# Altium PCB PCB1.PcbDoc
Units mil, origin at the board's own origin, x right, y up, seen from the top; angles counter-clockwise.
Board outline 6000 x 4000 mil, 2 copper layers (Top Layer, Bottom Layer), stack 34.296 mil thick; 49 components, 48 nets, 187 pads, 0 vias.
Unrouted connection lines stored in the file: 131.
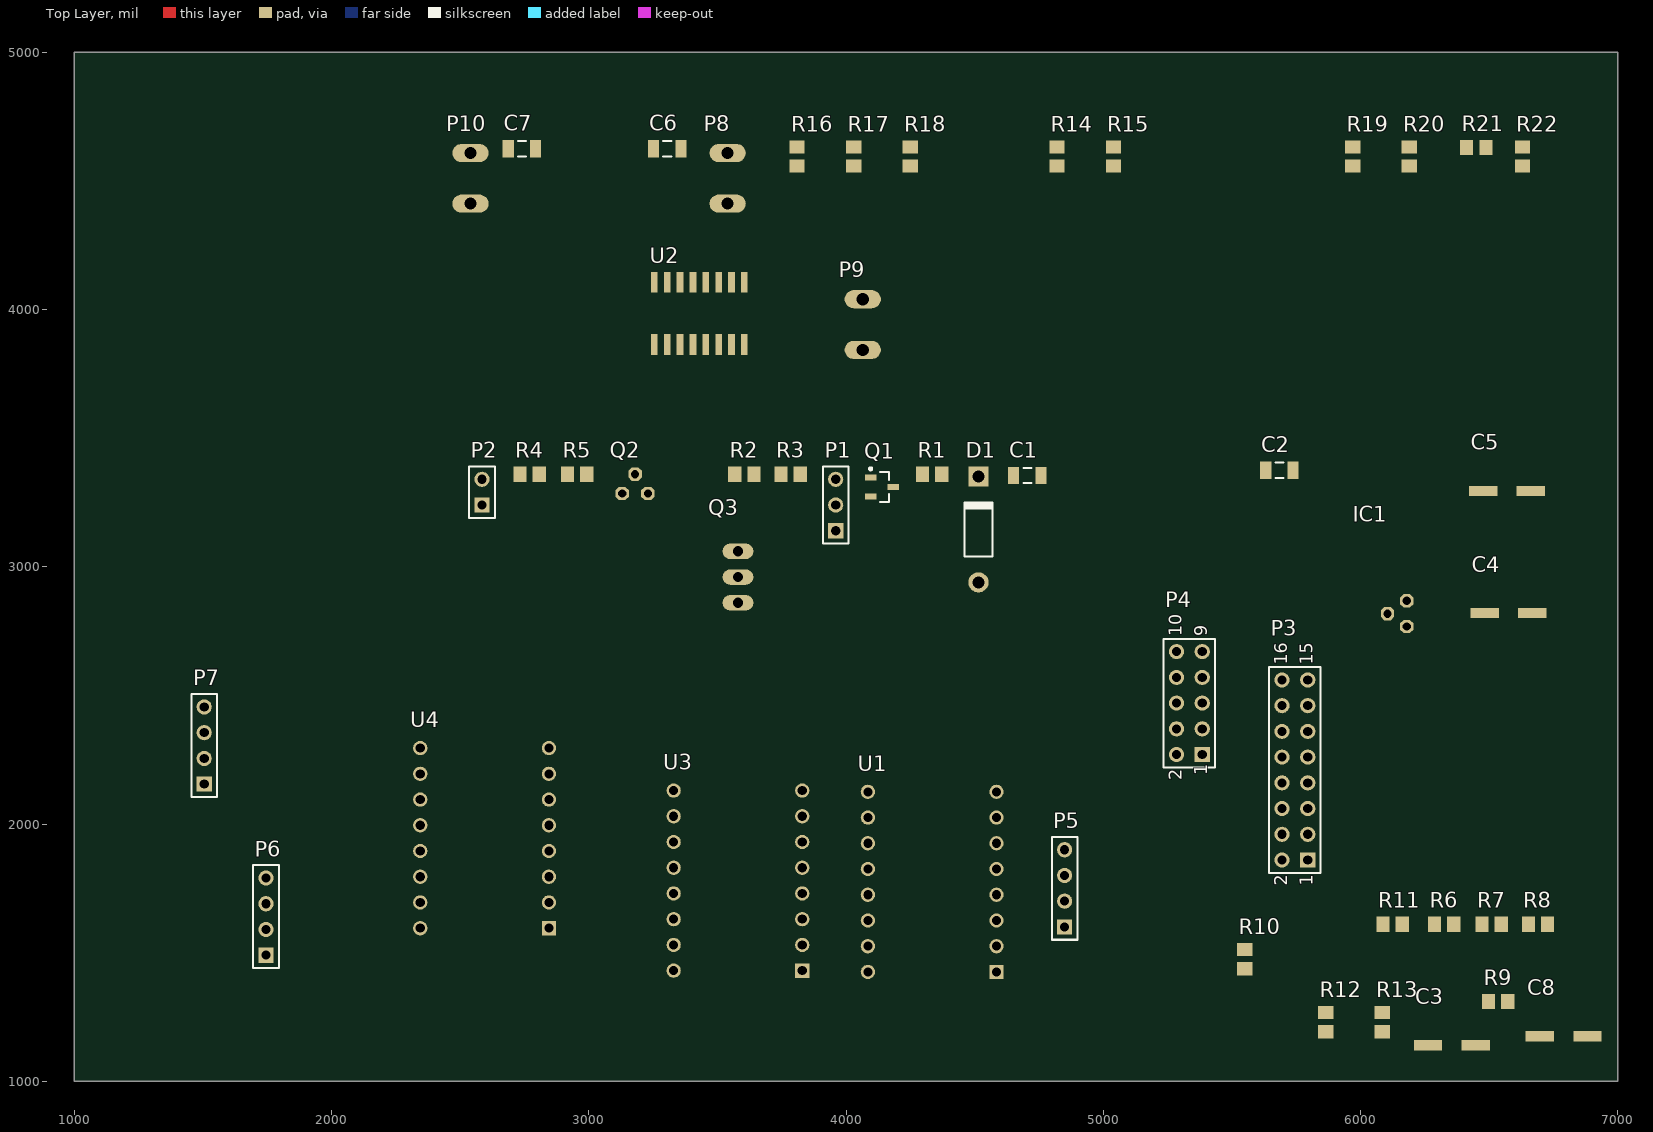
[diagram p0: Top Layer view]
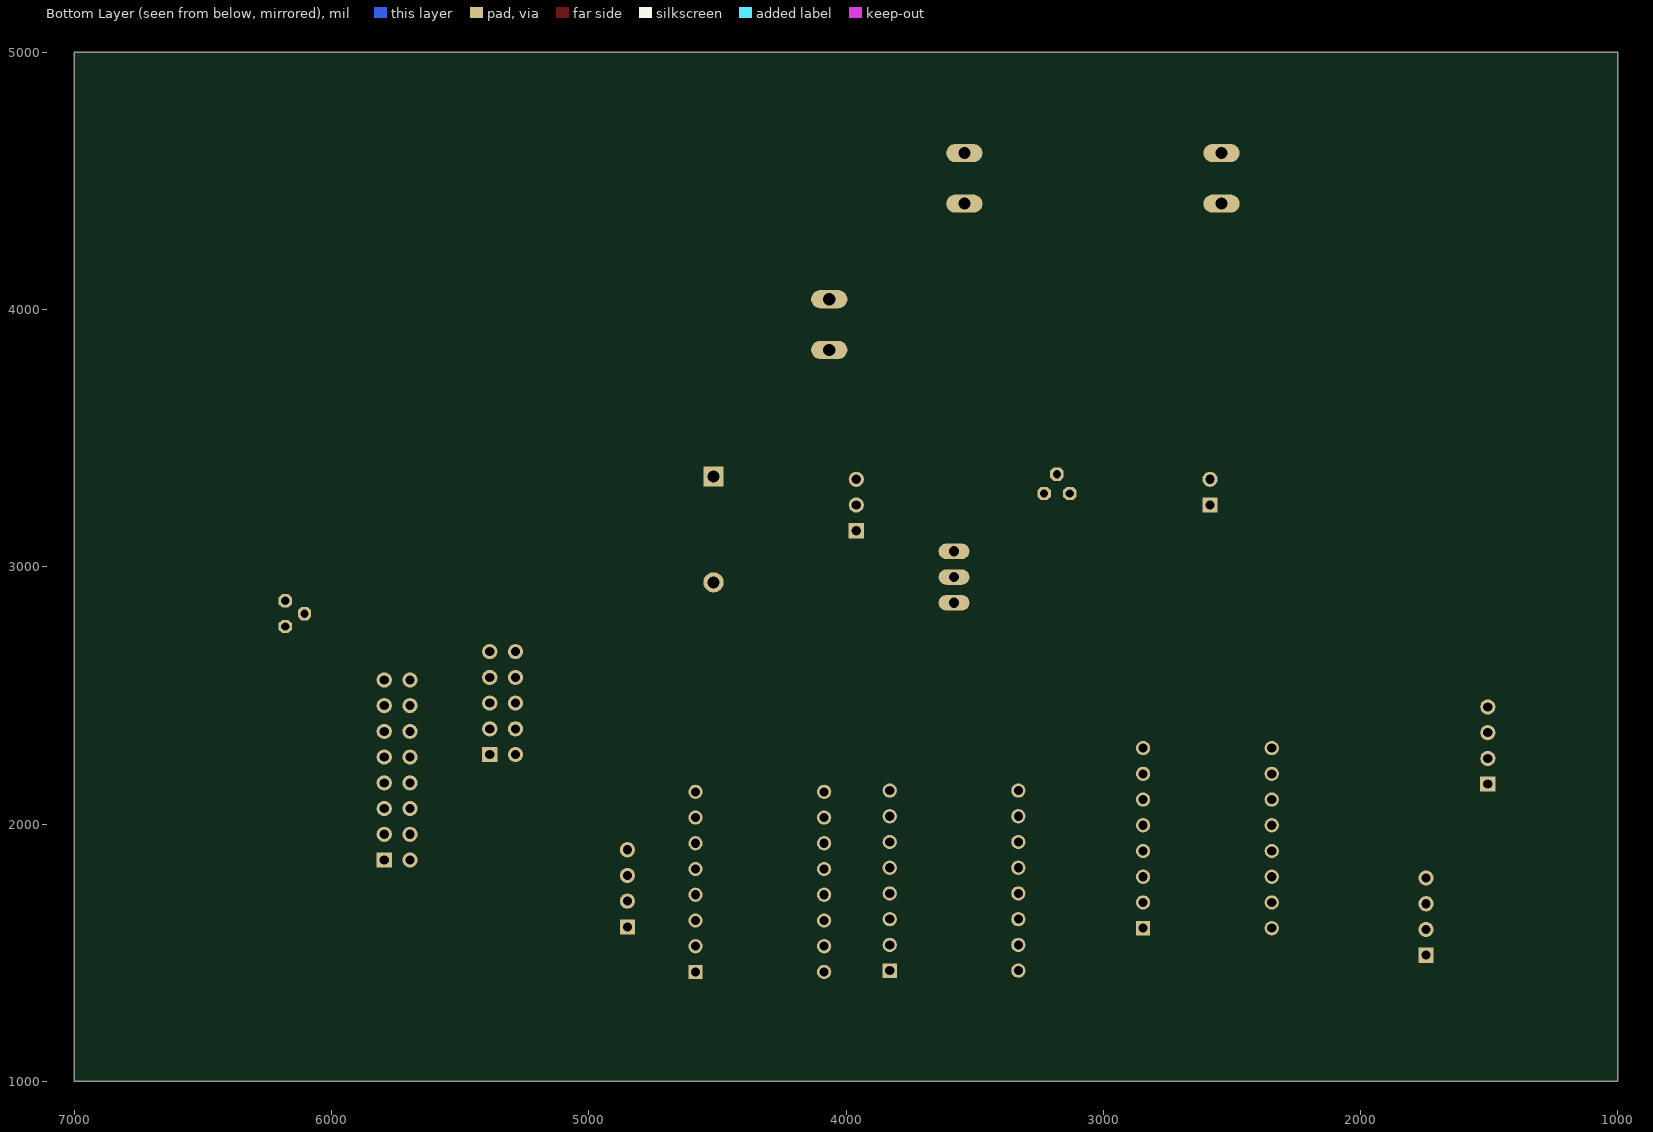
[diagram p1: Bottom Layer view, seen from below]

## Layer stack, top to bottom
Top Solder: solder mask 0.4, Solder Resist, Dk 3.5
Top Layer: signal copper 1.4
Dielectric 1: dielectric 31.4961, FR-4, Dk 4.8
Bottom Layer: signal copper 1.4
Bottom Solder: solder mask 0.4, Solder Resist, Dk 3.5

## Board outline
1000,1000 7000,1000 7000,5000 1000,5000

## Design rules (kind name [scope] priority, off if disabled: settings)
Clearance [All] p1: gap=10 ignorepadtopadclearanceinfootprint=FALSE except(0: Arc-Hole Track-Hole SMDPad-Hole THPad-Hole Via-Hole Fill-Hole Poly-Hole Region-Hole Text-Hole)
Height [All] p1: minheight=0 maxheight=10000 prefheight=500
PolygonConnect [All] p1: connectstyle=Relief reliefconductorwidth=10 reliefentries=4 polygonreliefangle="90 Angle" airgapwidth=10
RoutingVias [All] p1: holewidth=28 width=50 viastyle="Through Hole" minholewidth=28 minwidth=50 maxholewidth=28 maxwidth=50
SolderMaskExpansion [All] p1: expansion=4
Width [All] p1: maxlimit=10 minlimit=10 preferedwidth=10
29 further rules are at their usual default settings.

## Components (designator, comment, footprint, x,y, rotation, side; value= is the part's Value field where it differs from the comment)
C1 "Cap Semi" C1206 4705,3355 r0 top value=10uF
C2 "Cap Semi" C1206 5685,3375 r0 top value=10uF
C3 "Cap Pol1" UD-6,3X5,8_NICHICON 6355,1140 r0 top value=100pF
C4 "Cap Pol1" UD-6,3X5,8_NICHICON 6575,2820 r0 top value=100pF
C5 "Cap Pol1" UD-6,3X5,8_NICHICON 6570,3295 r0 top value=100pF
C6 "Cap Semi" C1206 3305,4625 r0 top value=10uF
C7 "Cap Semi" C1206 2740,4625 r0 top value=10uF
C8 "Cap Pol1" UD-6,3X5,8_NICHICON 6790,1175 r0 top value=100pF
D1 "Diode 1N4004" DO-41 4515,3145 r90 top
IC1 "78L05" TO92 6180,2817.72 r90 top
P1 "Header 3" HDR1X3 3960,3140 r90 top
P2 "Header 2" HDR1X2 2585,3240 r90 top
P3 "Header 8X2" HDR2X8 5795,1860 r90 top
P4 "Header 5X2" HDR2X5 5385,2270 r90 top
P5 "Header 4" HDR1X4 4850,1600 r90 top
P6 "Header 4" HDR1X4 1745,1490 r90 top
P7 "Header 4" HDR1X4 1505,2155 r90 top
P8 "Header 2" W237-102 3490,4510 r90 top
P9 "Header 2" W237-102 4015,3941.57 r90 top
P10 "Header 2" W237-102 2490,4510 r90 top
Q1 "PNP" SOT-23B_N 4140,3310 r0 top
Q2 "NPN" TO92 3180,3285 r0 top
Q3 "NMOS-2" TO220BV 3480,2960 r90 top
R1 "ERA6Y" ERA-0805 4335,3360 r0 top value=10k
R2 "ERA6Y" ERA-0805 3605,3360 r0 top value=10k
R3 "ERA6Y" ERA-0805 3785,3360 r0 top value=10k
R4 "ERA6Y" ERA-0805 2770,3360 r0 top value=10k
R5 "ERA6Y" ERA-0805 2955,3360 r0 top value=10k
R6 "ERA6Y" ERA-0805 6325,1610 r0 top value=10k
R7 "ERA6Y" ERA-0805 6510,1610 r0 top value=10k
R8 "ERA6Y" ERA-0805 6690,1610 r0 top value=10k
R9 "ERA6Y" ERA-0805 6535,1310 r0 top value=10k
R10 "ERA6Y" ERA-0805 5550,1475 r90 top value=10k
R11 "ERA6Y" ERA-0805 6125,1610 r0 top value=10k
R12 "ERA6Y" ERA-0805 5865,1230 r90 top value=10k
R13 "ERA6Y" ERA-0805 6085,1230 r90 top value=10k
R14 "ERA6Y" ERA-0805 4820,4595 r90 top value=10k
R15 "ERA6Y" ERA-0805 5040,4595 r90 top value=10k
R16 "ERA6Y" ERA-0805 3810,4595 r90 top value=10k
R17 "ERA6Y" ERA-0805 4030,4595 r90 top value=10k
R18 "ERA6Y" ERA-0805 4250,4595 r90 top value=10k
R19 "ERA6Y" ERA-0805 5970,4595 r90 top value=10k
R20 "ERA6Y" ERA-0805 6190,4595 r90 top value=10k
R21 "ERA6Y" ERA-0805 6450,4630 r0 top value=10k
R22 "ERA6Y" ERA-0805 6630,4595 r90 top value=10k
U1 "LV7829" LV8729_BREAKOUT 4135,1475 r90 top value=SNx4HC595
U2 "SNx4HC595" SO16 3430,3985 r0 top
U3 "LV7829" LV8729_BREAKOUT 3380,1480 r90 top value=SNx4HC595
U4 "LV7829" LV8729_BREAKOUT 2395,1645 r90 top value=SNx4HC595

## Footprints (in the part's own frame and the unit in brackets; to place one, negate y for a bottom-side part, rotate by r counter-clockwise, add the part's x,y. Pads: shape width x height; smd on the part's side, far side on the other; paste and mask are expansions set on the pad)
C1206 [mm] "Chip Capacitor, Body 3.2x1.6mm, IPC High Density"
  rect 1.1x1.7 smd: 1(-1.35,0) 2(1.35,0)
  silkscreen extent -0.4,-0.75 0.4,0.75, body extent -1.6,-0.8 1.6,0.82, height 1.64
DO-41 [mm] "Diode, Axial; Body 5.2 x 2.7 mm (LxDia. max), Lead Dia. 0.86 mm (max)"
  round 2 hole 1.2: 1(-5.23,0)
  rect 2x2 hole 1.2: 2(5.23,0)
  silkscreen extent -2.65,-1.4 2.75,1.4, body extent -6.01,-1.27 5.01,1.37, height 1.32
ERA-0805 [mm] "Chip Resistor; Body 2 x 1.3 mm (LxW typ)"
  rect 1.3x1.5 smd: 1(-0.95,0) 2(0.95,0)
  body extent -1.24,-0.65 1.29,0.6, height 0.51
HDR1X2 [mm] "Connector; Header; 2 Position"
  rect 1.5x1.5 hole 0.9: 1(0,0)
  round 1.5 hole 0.9: 2(2.54,0)
  silkscreen extent -1.27,-1.27 3.81,1.27, body extent -1.26,-1.28 3.82,1.26, height 8.61
HDR1X3 [mm] "Connector; Header; 3 Position"
  rect 1.5x1.5 hole 0.9: 1(0,0)
  round 1.5 hole 0.9: 2(2.54,0) 3(5.08,0)
  silkscreen extent -1.27,-1.27 6.35,1.27, body extent -1.29,-1.28 6.33,1.26, height 8.61
HDR1X4 [mm] "Connector; Header; 4 Position"
  rect 1.5x1.5 hole 0.9: 1(0,0)
  round 1.5 hole 0.9: 2(2.54,0) 3(5.08,0) 4(7.62,0)
  silkscreen extent -1.27,-1.27 8.89,1.27, body extent -1.28,-1.28 8.88,1.26, height 8.61
HDR2X5 [mm] "Connector; Header; 5x2 Position"
  rect 1.5x1.5 hole 0.9: 1(0,0)
  round 1.5 hole 0.9: 2(0,2.54) 3(2.54,0) 4(2.54,2.54) 5(5.08,0) 6(5.08,2.54) 7(7.62,0) 8(7.62,2.54) 9(10.16,0) 10(10.16,2.54)
  silkscreen extent -1.27,-1.27 11.43,3.81, body extent -1.28,-1.28 11.42,3.8, height 8.61
HDR2X8 [mm] "Connector; Header; 8x2 Position"
  rect 1.5x1.5 hole 0.9: 1(0,0)
  round 1.5 hole 0.9: 2(0,2.54) 3(2.54,0) 4(2.54,2.54) 5(5.08,0) 6(5.08,2.54) 7(7.62,0) 8(7.62,2.54) 9(10.16,0) 10(10.16,2.54) 11(12.7,0) 12(12.7,2.54) 13(15.24,0) 14(15.24,2.54) 15(17.78,0) 16(17.78,2.54)
  silkscreen extent -1.27,-1.27 19.05,3.81, body extent -1.29,-1.28 19.03,3.8, height 8.61
LV8729_BREAKOUT [mil] "LV8729_BREAKOUT"
  rect 55.43x55.43 hole 35.43: 1(-50,-450)
  round 55.43 / inner round 0 / far side round 55.43 hole 35.43: 2(50,-450) 3(150,-450) 4(250,-450) 5(350,-450) 6(450,-450) 7(550,-450) 8(650,-450) 9(650,50) 10(550,50) 11(450,50) 12(350,50) 13(250,50) 14(150,50) 15(50,50) 16(-50,50)
  body extent -100,-501 701,99, height 1024
SO16 [mil] "SO16"
  rect 26x80 smd: 1(-175,-121) 2(-125,-121) 3(-75,-121) 4(-25,-121) 5(25,-121) 6(75,-121) 7(125,-121) 8(175,-121) 9(175,121) 10(125,121) 11(75,121) 12(25,121) 13(-25,121) 14(-75,121) 15(-125,121) 16(-175,121)
  body extent -198,-121 198,121, height 79
SOT-23B_N [mm] "SOT23, 3-Leads, Body 2.9x1.3mm, Pitch 0.95mm, Lead Span 2.4mm, IPC Medium Density"
  rect 1.15x0.6 smd: 1(-1.125,0.95) 2(-1.125,-0.95) 3(1.125,0)
  silkscreen extent -1.25,-1.5 0.7,1.92, body extent -1.14,-1.45 1.19,1.45, height 1
TO92 [mil] "TO92"
  oct 52x52 / inner round 0 / far side oct 52x52 hole 32: 1(-50,0) 2(0,75) 3(50,0)
  body extent -98,-55 99,116, height 323
TO220BV [mil] "TO220BV"
  oval 60x120 / inner round 0 / far side oval 60x120 hole 40: 1(-100,-100) 2(0,-100) 3(100,-100)
  body extent -200,-155 200,25, height 730
UD-6,3X5,8_NICHICON [mm] "UD-6,3X5,8_NICHICON"
  rect 2.8x1 smd: 1(2.35,0) 2(-2.35,0)
  body extent -3.67,-3.3 3.63,3.3, height 5.41
W237-102 [mil] "W237-102"
  oval 70.5x141 / inner round 0 / far side oval 70.5x141 hole 47: 1(-98.43,-50) 2(98.43,-50)
  body extent -209,-187 201,120, height 409

## Part data
C1 C2 C6 C7: "Capacitor (Semiconductor SIM Model)", LatestRevisionDate=29-May-2009, LatestRevisionNote="IPC-7351 Footprint Added.", PackageDescription="Chip Capacitor", PackageReference=C1206, Published=8-Jun-2000, Publisher="Altium Limited"
C3 C4 C5 C8: "Polarized Capacitor (Radial)", LatestRevisionDate=17-Jul-2002, LatestRevisionNote="Re-released for DXP Platform.", PackageDescription="Polarized Capacitor (Radial); 2 Leads", PackageReference=RB7.6-15, Published=8-Jun-2000, Publisher="Altium Limited"
D1: "1 Amp General Purpose Rectifier", Code_JEDEC=DO-204-AL, ComponentLink1Description="Manufacturer Link", ComponentLink1URL=http://www.fairchildsemi.com/, ComponentLink2Description=Datasheet, ComponentLink2URL=http://www.fairchildsemi.com/ds/1N%2F1N4001.pdf, DatasheetVersion=1998, LatestRevisionDate=17-Jul-2002, LatestRevisionNote="Re-released for DXP Platform.", PackageDescription="Diode, Axial; Body 5.2 x 2.7 mm (LxDia. max), Lead Dia. 0.86 mm (max)", PackageReference=DO-41, PackageVersion=Aug-1999, Published=8-Jun-2000, Publisher="Altium Limited"
IC1: library part "Volt Reg", "Voltage Regulator", LatestRevisionDate=29-May-2009, LatestRevisionNote="IPC-7351 Footprint Added.", PackageDescription="3-Pin Transistor Outline Package 2.54 mm Pitch, 15.1 mm Lead Span", PackageReference=D2PAK, Published=24-Mar-1999, Publisher="Altium Limited"
P1: "Header, 3-Pin", LatestRevisionDate=17-Jul-2002, LatestRevisionNote="Re-released for DXP Platform.", Publisher="Altium Limited"
P2 P8 P9 P10: "Header, 2-Pin", LatestRevisionDate=17-Jul-2002, LatestRevisionNote="Re-released for DXP Platform.", Publisher="Altium Limited"
P3: "Header, 8-Pin, Dual row", LatestRevisionDate=17-Jul-2002, LatestRevisionNote="Re-released for DXP Platform.", Publisher="Altium Limited"
P4: "Header, 5-Pin, Dual row", LatestRevisionDate=17-Jul-2002, LatestRevisionNote="Re-released for DXP Platform.", Publisher="Altium Limited"
P5 P6 P7: "Header, 4-Pin", LatestRevisionDate=17-Jul-2002, LatestRevisionNote="Re-released for DXP Platform.", Publisher="Altium Limited"
Q1: "PNP Bipolar Transistor", LatestRevisionDate=29-May-2009, LatestRevisionNote="IPC-7351 Footprint Added.", PackageDescription="3-Pin SOT-23 Package 0.95 mm Pitch, 2.4 mm Lead Span", PackageReference=SOT-23B, PackageVersion=Aug-1999, Published=8-Jun-2000, Publisher="Altium Limited"
Q2: "NPN Bipolar Transistor", Code_JEDEC=TO-226-AA, LatestRevisionDate=17-Jul-2002, LatestRevisionNote="Re-released for DXP Platform.", PackageDescription="TO, Flat Index; 3 In-Line, Axial Leads; Body Dia. 4.8mm; Leads 0.55 x 0.51 mm (max)", PackageReference=TO-226-AA, Published=8-Jun-2000, Publisher="Altium Limited"
Q3: "N-Channel Power MOSFET", ComponentLink1Description="Manufacturer Link", ComponentLink1URL=http://www.irf.com/, DatasheetVersion=PD-9.814, LatestRevisionDate=17-Jul-2002, LatestRevisionNote="Re-released for DXP Platform.", Note="Pin 2 is electrically connected to pin 4.", PackageDescription="TO, Thru-Hole, Vertical, Heatsink Mounted; 3 In-Line Leads; Pitch 2.54 mm", PackageReference=TO-220AB, PackageVersion=Feb-1997, Published=8-Jun-2000, Publisher="Altium Limited"
R1 R2 R3 R4 R5 R6 R7 R8 R9 R10 R11 R12 R13 R14 R15 R16 R17 R18 R19 R20 R21 R22: "Rectangular Thick Film Chip Resistor, 10 Ohm to 1M Ohm Range, 0.1% and 0.5% Tolerance, 0805 Size, 0.1 W", PackageDocument=Mar-2003, Code_IPC="2012 [0805]", ComponentLink1Description="Manufacturer Link", ComponentLink1URL=http://www.panasonic.com/industrial/components/resistive_products.htm, ComponentLink2Description=Datasheet, ComponentLink2URL=http://www.panasonic.com/industrial/components/pdf/AOA0000CE8.pdf, LatestRevisionDate=19-Mar-2004, LatestRevisionNote="Silkscreen size reduced.", Note="If flow soldering, adjust pad width of PCB Footprint to 0.7 - 0.8 times the width of the resistor.", PackageReference=ERA-0805, Published=17-Dec-2003, Publisher="Altium Limited"
U1 U2 U3 U4: "Quad Bidir ESD protection", Manufacturer=STMICROELECTRONICS, Manufacturer_Part_Number=ESDA6V1BC6, BMS_Part_Number=9179038, ComponentLink1Description=Datasheet, ComponentLink1URL=http://tunmcdsvn.tun.st.com/Component_Datasheet_Library/Trunk/Diodes/STM_ESD_ESDA6V1BC6, ECCN_EU=NEC, ECCN_US=EAR99, Initial_Board_Reference=MB1311, Internal_Part_Number=MCD-00247, Part_Type=Diode, Provided_By="SUBCO with ST control", Status=Released

## Nets (pads, with @x,y where several pads share a name; then routed paths per layer and width w, separated by ;. In a path a pad name is that pad's centre, name@x,y a point inside that pad or via, vN(x,y) a via of type N, cw(c..) or ccw(c..) an arc to the next point about the centre after c; other vN are vias at no path point)
+3.3: P4.10 R19.1 R20.1 R21.1 R22.1
+5: C2.2 C3.1 C4.1 C5.1 C6.2 IC1.3 Q1.3 R14.1 R15.1 U1.10 U2.8 U3.10 U4.10
+12: C1.2 C7.2 C8.1 IC1.1 P8.2 P9.2 U1.16 U3.16 U4.16
GND: C1.1 C2.1 C3.2 C4.2 C5.2 C6.1 C7.1 C8.2 IC1.2 P1.1 P2.2 P3.15 P4.9 P8.1 P9.1 Q2.3 Q3.3 R4.2 R5.2 R6.2 R7.2 R8.2 R9.2 R10.2 R11.2 R12.2 R13.2 R16.2 R17.2 R18.2 U1.9 U1.15 U2.16 U3.9 U3.15 U4.9 U4.15
NetD1_1: D1.1 P10.2 Q3.2
NetP1_2: P1.2 P2.1
NetP1_3: P1.3 R2.2
NetP3_2: P3.2 R12.1 U1.1 U3.1 U4.1
NetP3_4: P3.4 R13.1 U1.5 U3.5 U4.5
NetP3_5: P3.5 R14.2 U2.13
NetP3_6: P3.6 U1.7
NetP3_7: P3.7 R16.1 U2.12
NetP3_8: P3.8 U1.8
NetP3_9: P3.9 R15.2 U2.10
NetP3_10: P3.10 U3.7
NetP3_11: P3.11 R17.1 U2.11
NetP3_12: P3.12 U3.8
NetP3_13: P3.13 R18.1 U2.14
NetP3_14: P3.14 U4.7
NetP3_16: P3.16 U4.8
NetP4_1: P4.1 P4.2 R22.2
NetP4_3: P4.3 P4.4 R21.2
NetP4_5: P4.5 P4.6 R20.2
NetP4_7: P4.7 P4.8 R19.2
NetP5_1: P5.1 U1.14
NetP5_2: P5.2 U1.13
NetP5_3: P5.3 U1.12
NetP5_4: P5.4 U1.11
NetP6_1: P6.1 U3.14
NetP6_2: P6.2 U3.13
NetP6_3: P6.3 U3.12
NetP6_4: P6.4 U3.11
NetP7_1: P7.1 U4.14
NetP7_2: P7.2 U4.13
NetP7_3: P7.3 U4.12
NetP7_4: P7.4 U4.11
NetQ1_1: Q1.1 R3.2
NetQ1_2: Q1.2 R1.1
NetQ2_1: Q2.1 R1.2
NetQ2_2: Q2.2 R2.1 R4.1
NetQ3_1: Q3.1 R3.1 R5.1
NetR6_1: R6.1 U1.2 U2.15 U3.2
NetR7_1: R7.1 U1.4 U2.2 U3.4
NetR8_1: R8.1 U2.4 U4.3
NetR9_1: R9.1 U1.3 U2.1 U3.3
NetR10_1: R10.1 U2.3 U4.2
NetR11_1: R11.1 U2.5 U4.4
VCC: D1.2 P10.1
pads on no net: P3.1 P3.3 U1.6 U2.6 U2.7 U2.9 U3.6 U4.6

## Text inside footprints (layer, text, board x,y; h text height)
P3: Top Overlay "2" at 5715,1760 h50 r90; Top Overlay "1" at 5815,1760 h50 r90; Top Overlay "15" at 5815,2620 h50 r90; Top Overlay "16" at 5715,2620 h50 r90
P4: Top Overlay "2" at 5305,2170 h50 r90; Top Overlay "1" at 5405,2190 h50 r90; Top Overlay "9" at 5405,2730 h50 r90; Top Overlay "10" at 5305,2730 h50 r90
P8: Mechanical 7 "2" at 3465,4526.57 h77.5 r90; Mechanical 7 "1" at 3465,4331.57 h77.5 r90
P9: Mechanical 7 "2" at 3990,3958.14 h77.5 r90; Mechanical 7 "1" at 3990,3763.14 h77.5 r90
P10: Mechanical 7 "2" at 2465,4526.57 h77.5 r90; Mechanical 7 "1" at 2465,4331.57 h77.5 r90
U1: Mechanical 7 "SLP" at 4535,1950 h37.2 r180; Mechanical 7 "GND" at 4135,2100 h37.2; Mechanical 7 "VDD" at 4135,2000 h37.2; Mechanical 7 "1B" at 4135,1900 h37.2; Mechanical 7 "1A" at 4135,1800 h37.2; Mechanical 7 "2A" at 4135,1700 h37.2; Mechanical 7 "2B" at 4135,1600 h37.2; Mechanical 7 "GND" at 4135,1500 h37.2; Mechanical 7 "Vmot" at 4135,1400 h37.2; Mechanical 7 "DIR" at 4535,2150 h37.2 r180; Mechanical 7 "STEP" at 4535,2050 h37.2 r180; Mechanical 7 "RST" at 4535,1850 h37.2 r180; Mechanical 7 "MS3" at 4535,1750 h37.2 r180; Mechanical 7 "MS2" at 4535,1650 h37.2 r180; Mechanical 7 "MS1" at 4535,1550 h37.2 r180; Mechanical 7 "EN" at 4535,1450 h37.2 r180
U3: Mechanical 7 "SLP" at 3780,1955 h37.2 r180; Mechanical 7 "GND" at 3380,2105 h37.2; Mechanical 7 "VDD" at 3380,2005 h37.2; Mechanical 7 "1B" at 3380,1905 h37.2; Mechanical 7 "1A" at 3380,1805 h37.2; Mechanical 7 "2A" at 3380,1705 h37.2; Mechanical 7 "2B" at 3380,1605 h37.2; Mechanical 7 "GND" at 3380,1505 h37.2; Mechanical 7 "Vmot" at 3380,1405 h37.2; Mechanical 7 "DIR" at 3780,2155 h37.2 r180; Mechanical 7 "STEP" at 3780,2055 h37.2 r180; Mechanical 7 "RST" at 3780,1855 h37.2 r180; Mechanical 7 "MS3" at 3780,1755 h37.2 r180; Mechanical 7 "MS2" at 3780,1655 h37.2 r180; Mechanical 7 "MS1" at 3780,1555 h37.2 r180; Mechanical 7 "EN" at 3780,1455 h37.2 r180
U4: Mechanical 7 "SLP" at 2795,2120 h37.2 r180; Mechanical 7 "GND" at 2395,2270 h37.2; Mechanical 7 "VDD" at 2395,2170 h37.2; Mechanical 7 "1B" at 2395,2070 h37.2; Mechanical 7 "1A" at 2395,1970 h37.2; Mechanical 7 "2A" at 2395,1870 h37.2; Mechanical 7 "2B" at 2395,1770 h37.2; Mechanical 7 "GND" at 2395,1670 h37.2; Mechanical 7 "Vmot" at 2395,1570 h37.2; Mechanical 7 "DIR" at 2795,2320 h37.2 r180; Mechanical 7 "STEP" at 2795,2220 h37.2 r180; Mechanical 7 "RST" at 2795,2020 h37.2 r180; Mechanical 7 "MS3" at 2795,1920 h37.2 r180; Mechanical 7 "MS2" at 2795,1820 h37.2 r180; Mechanical 7 "MS1" at 2795,1720 h37.2 r180; Mechanical 7 "EN" at 2795,1620 h37.2 r180